# Altium PCB LAF_LM.PcbDoc
Units mm, origin at the board's own origin, x right, y up, seen from the top; angles counter-clockwise.
Board outline 80 x 60 mm, 2 copper layers (Top Layer, Bottom Layer); 15 components, 10 nets, 38 pads, 28 vias.
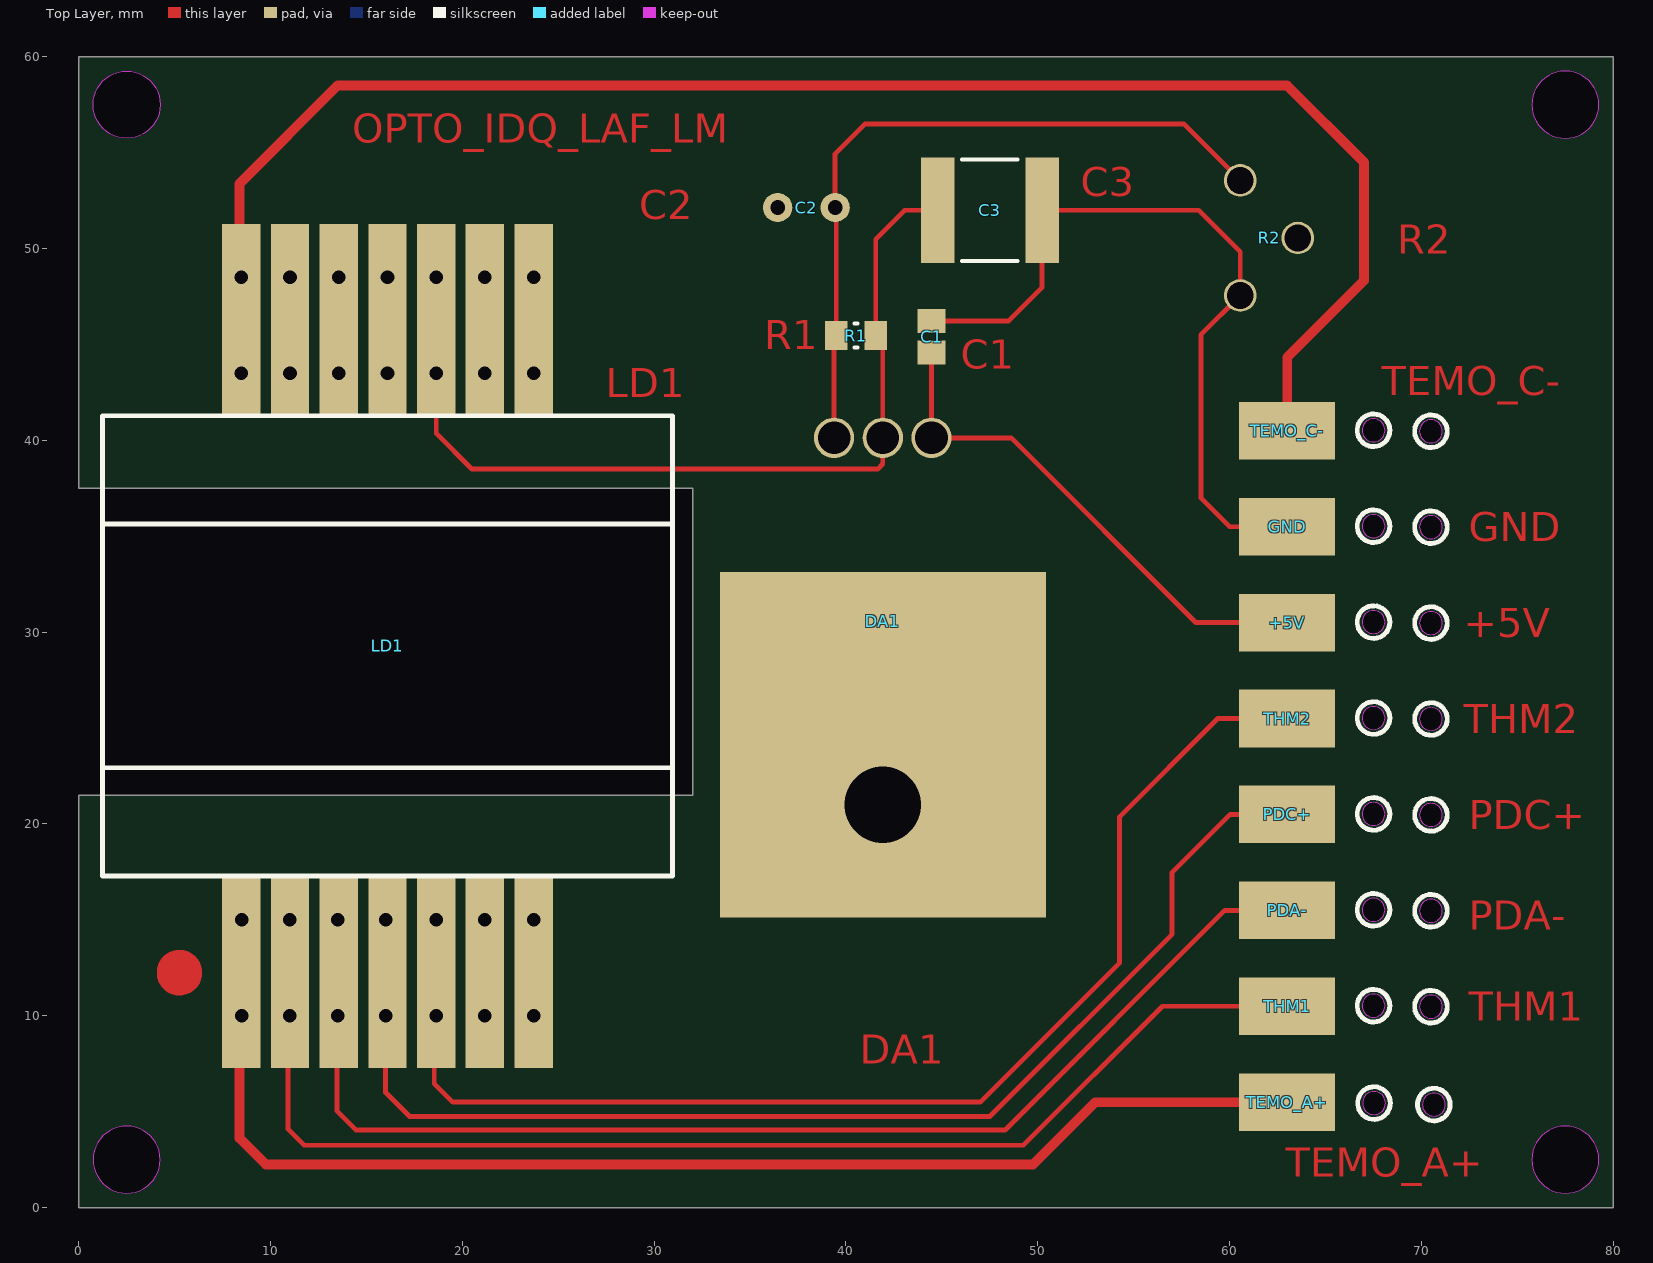
[diagram p0: Top Layer view]
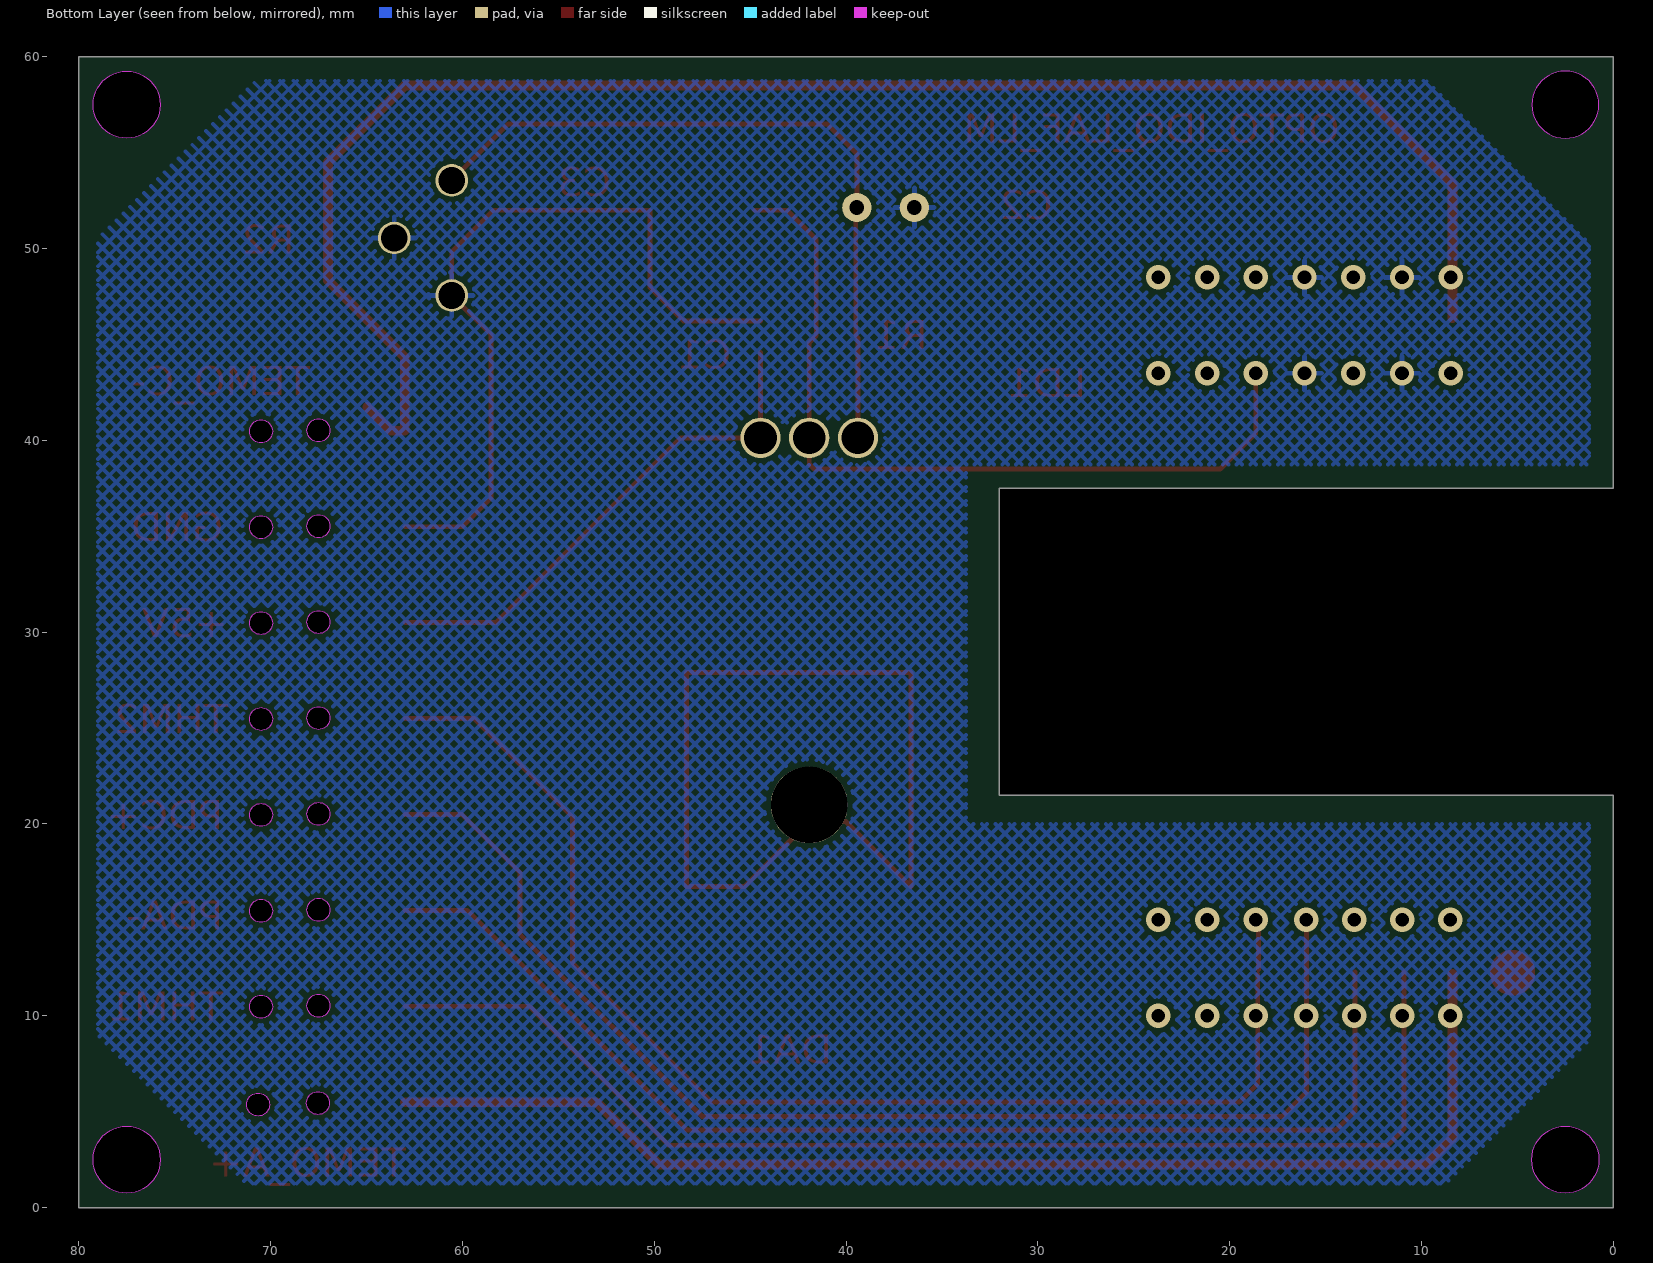
[diagram p1: Bottom Layer view, seen from below]

## Layer stack, top to bottom
Top Solder: solder mask 0.0102, Solder Resist, Dk 3.5
Top Layer: signal copper 0.0356
Dielectric 1: dielectric 0.32, FR-4, Dk 4.8
Bottom Layer: signal copper 0.0356
Bottom Solder: solder mask 0.0102, Solder Resist, Dk 3.5

## Board outline
0,37.5 0,60 80,60 80,0 0,0 0,21.5 32,21.5 32,37.5
cut-out: 66.928,5.449 ccw(c67.528,5.449) 67.528,4.849 ccw(c67.528,5.449) 68.128,5.449 ccw(c67.528,5.449) 67.528,6.049 ccw(c67.528,5.449)
cut-out: 66.903,25.525 ccw(c67.503,25.525) 67.503,24.925 ccw(c67.503,25.525) 68.103,25.525 ccw(c67.503,25.525) 67.503,26.125 ccw(c67.503,25.525)
cut-out: 66.903,30.525 ccw(c67.503,30.525) 67.503,29.925 ccw(c67.503,30.525) 68.103,30.525 ccw(c67.503,30.525) 67.503,31.125 ccw(c67.503,30.525)
cut-out: 66.903,35.525 ccw(c67.503,35.525) 67.503,34.925 ccw(c67.503,35.525) 68.103,35.525 ccw(c67.503,35.525) 67.503,36.125 ccw(c67.503,35.525)
cut-out: 66.903,15.525 ccw(c67.503,15.525) 67.503,14.925 ccw(c67.503,15.525) 68.103,15.525 ccw(c67.503,15.525) 67.503,16.125 ccw(c67.503,15.525)
cut-out: 66.903,10.525 ccw(c67.503,10.525) 67.503,9.925 ccw(c67.503,10.525) 68.103,10.525 ccw(c67.503,10.525) 67.503,11.125 ccw(c67.503,10.525)
cut-out: 66.903,40.525 ccw(c67.503,40.525) 67.503,39.925 ccw(c67.503,40.525) 68.103,40.525 ccw(c67.503,40.525) 67.503,41.125 ccw(c67.503,40.525)
cut-out: 66.903,20.525 ccw(c67.503,20.525) 67.503,19.925 ccw(c67.503,20.525) 68.103,20.525 ccw(c67.503,20.525) 67.503,21.125 ccw(c67.503,20.525)
cut-out: 69.896,30.475 ccw(c70.496,30.475) 70.496,29.875 ccw(c70.496,30.475) 71.096,30.475 ccw(c70.496,30.475) 70.496,31.075 ccw(c70.496,30.475)
cut-out: 69.896,35.475 ccw(c70.496,35.475) 70.496,34.875 ccw(c70.496,35.475) 71.096,35.475 ccw(c70.496,35.475) 70.496,36.075 ccw(c70.496,35.475)
cut-out: 69.896,40.475 ccw(c70.496,40.475) 70.496,39.875 ccw(c70.496,40.475) 71.096,40.475 ccw(c70.496,40.475) 70.496,41.075 ccw(c70.496,40.475)
cut-out: 69.896,25.475 ccw(c70.496,25.475) 70.496,24.875 ccw(c70.496,25.475) 71.096,25.475 ccw(c70.496,25.475) 70.496,26.075 ccw(c70.496,25.475)
cut-out: 69.896,10.475 ccw(c70.496,10.475) 70.496,9.875 ccw(c70.496,10.475) 71.096,10.475 ccw(c70.496,10.475) 70.496,11.075 ccw(c70.496,10.475)
cut-out: 69.896,15.475 ccw(c70.496,15.475) 70.496,14.875 ccw(c70.496,15.475) 71.096,15.475 ccw(c70.496,15.475) 70.496,16.075 ccw(c70.496,15.475)
cut-out: 69.896,20.475 ccw(c70.496,20.475) 70.496,19.875 ccw(c70.496,20.475) 71.096,20.475 ccw(c70.496,20.475) 70.496,21.075 ccw(c70.496,20.475)
cut-out: 70.049,5.373 ccw(c70.649,5.373) 70.649,4.773 ccw(c70.649,5.373) 71.249,5.373 ccw(c70.649,5.373) 70.649,5.973 ccw(c70.649,5.373)
cut-out: 2.5,55.75 cw(c2.5,57.5) 0.75,57.5 cw(c2.5,57.5) 2.5,59.25 cw(c2.5,57.5) 4.25,57.5 cw(c2.5,57.5)
cut-out: 75.75,57.5 ccw(c77.5,57.5) 77.5,55.75 ccw(c77.5,57.5) 79.25,57.5 ccw(c77.5,57.5) 77.5,59.25 ccw(c77.5,57.5)
cut-out: 75.75,2.5 ccw(c77.5,2.5) 77.5,0.75 ccw(c77.5,2.5) 79.25,2.5 ccw(c77.5,2.5) 77.5,4.25 ccw(c77.5,2.5)
cut-out: 0.75,2.5 ccw(c2.5,2.5) 2.5,0.75 ccw(c2.5,2.5) 4.25,2.5 ccw(c2.5,2.5) 2.5,4.25 ccw(c2.5,2.5)

## Design rules (kind name [scope] priority, off if disabled: settings)
Clearance [All] p1: gap=0.254 ignorepadtopadclearanceinfootprint=FALSE except(0: Arc-Hole Track-Hole SMDPad-Hole THPad-Hole Via-Hole Fill-Hole Poly-Hole Region-Hole Text-Hole)
PolygonConnect [All] p1: connectstyle=Relief reliefconductorwidth=0.254 reliefentries=4 polygonreliefangle="90 Angle" airgapwidth=0.254
RoutingVias [All] p1: holewidth=0.711 width=1.27 viastyle="Through Hole" minholewidth=0.711 minwidth=1.27 maxholewidth=0.711 maxwidth=1.27
SolderMaskExpansion [All] p1: expansion=0.102 istentingtop=FALSE
Width [All] p1: maxlimit=1 minlimit=0.15 preferedwidth=0.254
30 further rules are at their usual default settings.

## Classes and differential pairs
component class Sheet1: +5V C1 C2 C3 DA1 GND LD1 PDA- PDC+ R1 R2 TEMO_A+ TEMO_C- THM1

## Components (designator, comment, footprint, x,y, rotation, side; value= is the part's Value field where it differs from the comment)
+5V "+5V" MGTF_PAD#1 63,35.5 r0 top
C1 "VJ0805Y105KXQRW1BC" CAPC2013X145X50NL20T20 44.458,45.403 r270 top
C2 "K50-96" КР50-96 39.436,52.139 r180 top
C3 "" CAPC2220(5750)230_M 47.5,52 r180 top value=10nF
DA1 "КР142ЕН12" КР14Е2Н12 44.458,40.132 r180 top (schematic designator DA?)
GND "MGTF_PAD" MGTF_PAD#2 63,43 r0 top
LD1 "FPL-1064-14BF-5" FPL-1064-14BF-5 16.095,29.281 r270 top (schematic designator LD?)
PDA- "MGTF_PAD" MGTF_PAD#3 64,15 r180 top
PDC+ "MGTF_PAD" MGTF_PAD#4 63.962,23.455 r180 top
R1 "" FP-MCU0805-IPC_A 40.521,45.466 r0 top
R2 "СП5-2" СП5-2 63.555,50.555 r0 top
TEMO_A+ "MGTF_PAD" MGTF_PAD#5 63.5,6.74 r180 top
TEMO_C- "MGTF_PAD" MGTF_PAD#6 62,49 r180 top
THM1 "MGTF_PAD" MGTF_PAD#7 63.5,13.5 r180 top (schematic designator Thermosistor1)
THM2 "MGTF_PAD" MGTF_PAD#8 63.835,28.408 r180 top (schematic designator Thermoresistor2)

## Footprints (in the part's own frame and the unit in brackets; to place one, negate y for a bottom-side part, rotate by r counter-clockwise, add the part's x,y. Pads: shape width x height; smd on the part's side, far side on the other; paste and mask are expansions set on the pad)
CAPC2013X145X50NL20T20 [mm] "Chip Capacitor, 2-Leads, Body 2.00x1.25mm, IPC Medium Density"
  rect 1.25x1.45 smd: 1(-0.825,0) 2(0.825,0)
  body extent -1.1,-0.72 1.1,0.72, height 1.45
CAPC2220(5750)230_M [mm] "Chip Capacitor, Body 5.7x5.0mm, Height 2.3mm, IPC Low Density"
  rect 1.75x5.5 smd: 1(-2.725,0) 2(2.725,0)
  silkscreen extent -1.45,-2.65 1.45,2.65, body extent -3.05,-2.7 3.05,2.7, height 2.3
FP-MCU0805-IPC_A [mm]
  rect 1.159x1.508 smd paste+0 mask+0: 1(-1.027,0) 2(1.027,0)
  silkscreen extent -0.07,-0.63 0.07,0.63, body extent -2.11,-1.25 2.11,1.25, height 0.25
FPL-1064-14BF-5 [mm]
  rect 10x2 smd: 1(17,-7.62) 2(17,-5.08) 3(17,-2.54) 4(17,0) 5(17,2.54) 6(17,5.08) 7(17,7.62) 8(-17,7.62) 9(-17,5.08) 10(-17,2.54) 11(-17,0) 12(-17,-2.54) 13(-17,-5.08) 14(-17,-7.62)
  silkscreen extent -12,-14.85 12,14.85
MGTF_PAD#1 [mm]
  rect 5x3 smd: 1(0,-5)
MGTF_PAD#2 [mm]
  rect 5x3 smd: 1(0,-7.5)
MGTF_PAD#3 [mm]
  rect 5x3 smd: 1(1,-0.5)
MGTF_PAD#4 [mm]
  rect 5x3 smd: 1(0.962,2.955)
MGTF_PAD#5 [mm]
  rect 5x3 smd: 1(0.5,1.24)
MGTF_PAD#6 [mm]
  rect 5x3 smd: 1(-1,8.5)
MGTF_PAD#7 [mm]
  rect 5x3 smd: 1(0.5,3)
MGTF_PAD#8 [mm]
  rect 5x3 smd: 1(0.835,2.908)
КР14Е2Н12 [mm]
  round 2.1 hole 1.7: 1(0,0) 2(2.54,0) 3(5.08,0)
  rect 17x18 smd: 4(2.54,16)
  round 4 hole 4 unplated: 25(2.54,19.132)
  Top Layer lines w0.254: 7.849,23.393 7.849,12.243 -3.861,12.243 -3.861,23.393 -0.853,23.393 2.54,20 4.455,20 7.849,23.393
КР50-96 [mil]
  round 60 hole 30: 1(0,0) 2(118.11,0)
СП5-2 [mm]
  round 1.7 hole 1.4: 1(-3,-3) 2(0,0) 3(-3,3)

## Part data
+5V: library part MGTF_PAD
C1: library part CMP-2007-01676-1, Manufacturer=Vitramon, Part Number=VJ0805Y105KXQRW1BC
C3: library part CMP-1042-00301-2, "CAP 10nF 200V ±5% 2220 (5750 Metric) Thickness 2.3mm SMD", Case-EIA=2220, Case-Metric=5750, Rated Voltage="200 V", Tolerance=Â±5%, Max Thickness="2.3 mm", Technology=SMT
R1: library part CMP-02407-001292-1, "RES 1.05K OHM 0.5% 1/5W 0805", Case Code (Imperial)=0805, Case Code (Metric)=2012, Max Operating Temperature=155°C, Max Power Dissipation=200mW, Min Operating Temperature=-55°C, Package Quantity=1, Resistance=100R, Temperature Coefficient=25ppm/°C, Tolerance=0.1%, Voltage Rating=150V, Case/Package=0805, Composition="Thin Film", Features="Automotive AEC-Q200", Height=0.024inch, Length=0.079inch, Number of Terminations=2, Packaging="Tape and Reel", Power Rating=200mW, Weight=0.000162oz, Width=0.049inch

## Via types
v1: diameter 1.27, hole 0.711, Top Layer to Bottom Layer, 28 vias

## Nets (pads, with @x,y where several pads share a name; then routed paths per layer and width w, separated by ;. In a path a pad name is that pad's centre, name@x,y a point inside that pad or via, vN(x,y) a via of type N, cw(c..) or ccw(c..) an arc to the next point about the centre after c; other vN are vias at no path point)
GND: C1.1 C2.2 C3.1 GND.1 LD1.11 LD1.13 R2.1 R2.2 | length 40.5
  Top Layer w0.254: C1.1 48.478,46.228 50.225,47.975 C3.1 58.388,52 60.555,49.833 R2.1 58.5,45.5 58.5,37 60,35.5 GND.1
  other v1: 11.015,43.5 16.095,43.5 11.015,48.5 16.095,48.5
Net+5V_1: +5V.1 C1.2 DA1.1 | length 27
  Top Layer w0.254: C1.2 DA1.1 48.616,40.132 58.248,30.5 +5V.1
NetC2_1: C2.1 DA1.3 R1.1 R2.3 | length 37.9
  Top Layer w0.254: DA1.3 39.378,45.35 R1.1 39.494,52.081 C2.1 39.436,54.936 41,56.5 57.61,56.5 R2.3
NetC3_2: C3.2 DA1.2 LD1.10 R1.2 | length 43
  Top Layer w0.254: v1(18.635,43.5) 18.635,40.365 20.5,38.5 41.65,38.5 41.918,38.768 41.918,45.096 R1.2 41.548,50.489 43.059,52 C3.2
  other v1: 18.635,48.5
NetLD?_1: LD1.1 TEMO_A+.1 | length 65.1
  Top Layer w0.508: LD1.1@8.38,12.186 8.38,3.62 9.75,2.25 49.75,2.25 53,5.5 62,5.5 TEMO_A+.1
  other v1: 8.5,10 8.5,15
NetLD?_2: LD1.2 THM1.1 | length 63.6
  Top Layer w0.254: LD1.2@10.914,12.281 10.914,4.086 11.75,3.25 49.25,3.25 56.5,10.5 THM1.1
  other v1: 11,10 11,15
NetLD?_3: LD1.3 PDA-.1 | length 61.9
  Top Layer w0.254: LD1.3@13.46,12.281 13.46,10 13.46,5.04 14.46,4.04 48.29,4.04 59.75,15.5 PDA-.1
  other v1: 13.5,10 13.5,15
NetLD?_4: LD1.4 PDC+.1 | length 64.9
  Top Layer w0.254: v1(16,15) 15.994,14.994 15.994,10 15.994,6.006 17.25,4.75 47.5,4.75 57,14.25 57,17.478 60.022,20.5 PDC+.1
  other v1: 16,10
NetLD?_5: LD1.5 THM2.1 | length 65.9
  Top Layer w0.254: LD1.5@18.5,12.416 LD1.5@18.5,15 ; LD1.5@18.534,12.18 18.534,10 18.534,6.466 19.5,5.5 47,5.5 54.264,12.764 54.264,20.38 59.384,25.5 THM2.1
  other v1: 18.635,10 18.635,15
NetLD?_14: LD1.14 TEMO_C-.1 | length 87.5
  Top Layer w0.508: LD1.14@8.38,46.376 8.38,48.5 8.38,53.38 13.5,58.5 63,58.5 67,54.5 67,48.331 63,44.331 TEMO_C-.1 63.718,40.5 TEMO_C-.1@64.964,41.746
  other v1: 8.475,43.5 8.475,48.5
pads on no net: DA1.4 DA1.25 LD1.6 LD1.7 LD1.8 LD1.9 LD1.12
copper on no net: | length 3.5
  Top Layer w1.254: 5.809,12.25 ccw(c5.25,12.25) 5.809,12.25
  other v1: 21.175,10 23.715,10 21.175,15 23.715,15 13.555,43.5 21.175,43.5 23.715,43.5 13.555,48.5 21.175,48.5 23.715,48.5

## Polygon pours and split planes (outlines as drawn)
GND on Bottom Layer "GND_L02_P000" (hatched 45Degree grid 0.508 track 0.203, pour order 0): 9.75,58.75 1.25,50.25 1.25,38.75 33.75,38.75 33.75,20 1.25,20 1.25,8.75 8.75,1.25 71.25,1.25 79,9 79,50.5 70.75,58.75

## Other copper
Top Layer:
  text "OPTO_IDQ_LAF_LM" at 14.254,55.508 h1.52

## Silkscreen, mask and mechanical layers (free items; w line width, h text height)
Top Overlay:
  circle w0.254: c67.503,15.525 r0.85
  circle w0.254: c67.503,20.525 r0.85
  circle w0.254: c67.503,40.525 r0.85
  circle w0.254: c67.503,10.525 r0.85
  circle w0.254: c67.503,30.525 r0.85
  circle w0.254: c67.503,35.525 r0.85
  circle w0.254: c67.503,25.525 r0.85
  circle w0.254: c70.496,25.475 r0.85
  circle w0.254: c70.496,20.475 r0.85
  circle w0.254: c70.496,10.475 r0.85
  circle w0.254: c70.496,35.475 r0.85
  circle w0.254: c70.496,40.475 r0.85
  circle w0.254: c70.496,30.475 r0.85
  circle w0.254: c70.496,15.475 r0.85
  circle w0.254: c67.528,5.449 r0.85
  circle w0.254: c70.649,5.373 r0.85
Mechanical 1:
  circle w0.254: c67.528,5.449 r0.6
  circle w0.254: c67.503,40.525 r0.6
  circle w0.254: c67.503,20.525 r0.6
  circle w0.254: c67.503,35.525 r0.6
  circle w0.254: c67.503,30.525 r0.6
  circle w0.254: c67.503,15.525 r0.6
  circle w0.254: c67.503,25.525 r0.6
  circle w0.254: c67.503,10.525 r0.6
  circle w0.254: c70.496,20.475 r0.612
  circle w0.254: c70.496,15.475 r0.612
  circle w0.254: c70.496,10.475 r0.612
  circle w0.254: c70.496,25.475 r0.612
  circle w0.254: c70.496,40.475 r0.612
  circle w0.254: c70.496,35.475 r0.612
  circle w0.254: c70.496,30.475 r0.612
  circle w0.254: c70.649,5.373 r0.612
  circle w0.254: c77.5,57.5 r1.75
  circle w0.254: c2.5,2.5 r1.75
  circle w0.254: c2.5,57.5 r1.75
  circle w0.254: c77.5,2.5 r1.75
  lines w0.254: 0,0 0,21.5 32,21.5 32,37.5 0,37.5 0,60 80,60 80,0 0,0